# Altium PCB BlinkerAC.PcbDoc
Units mil, origin at the board's own origin, x right, y up, seen from the top; angles counter-clockwise.
Board outline 1150 x 2095 mil, 2 copper layers (Top Layer, Bottom Layer); 27 components, 16 nets, 122 pads, 101 vias.
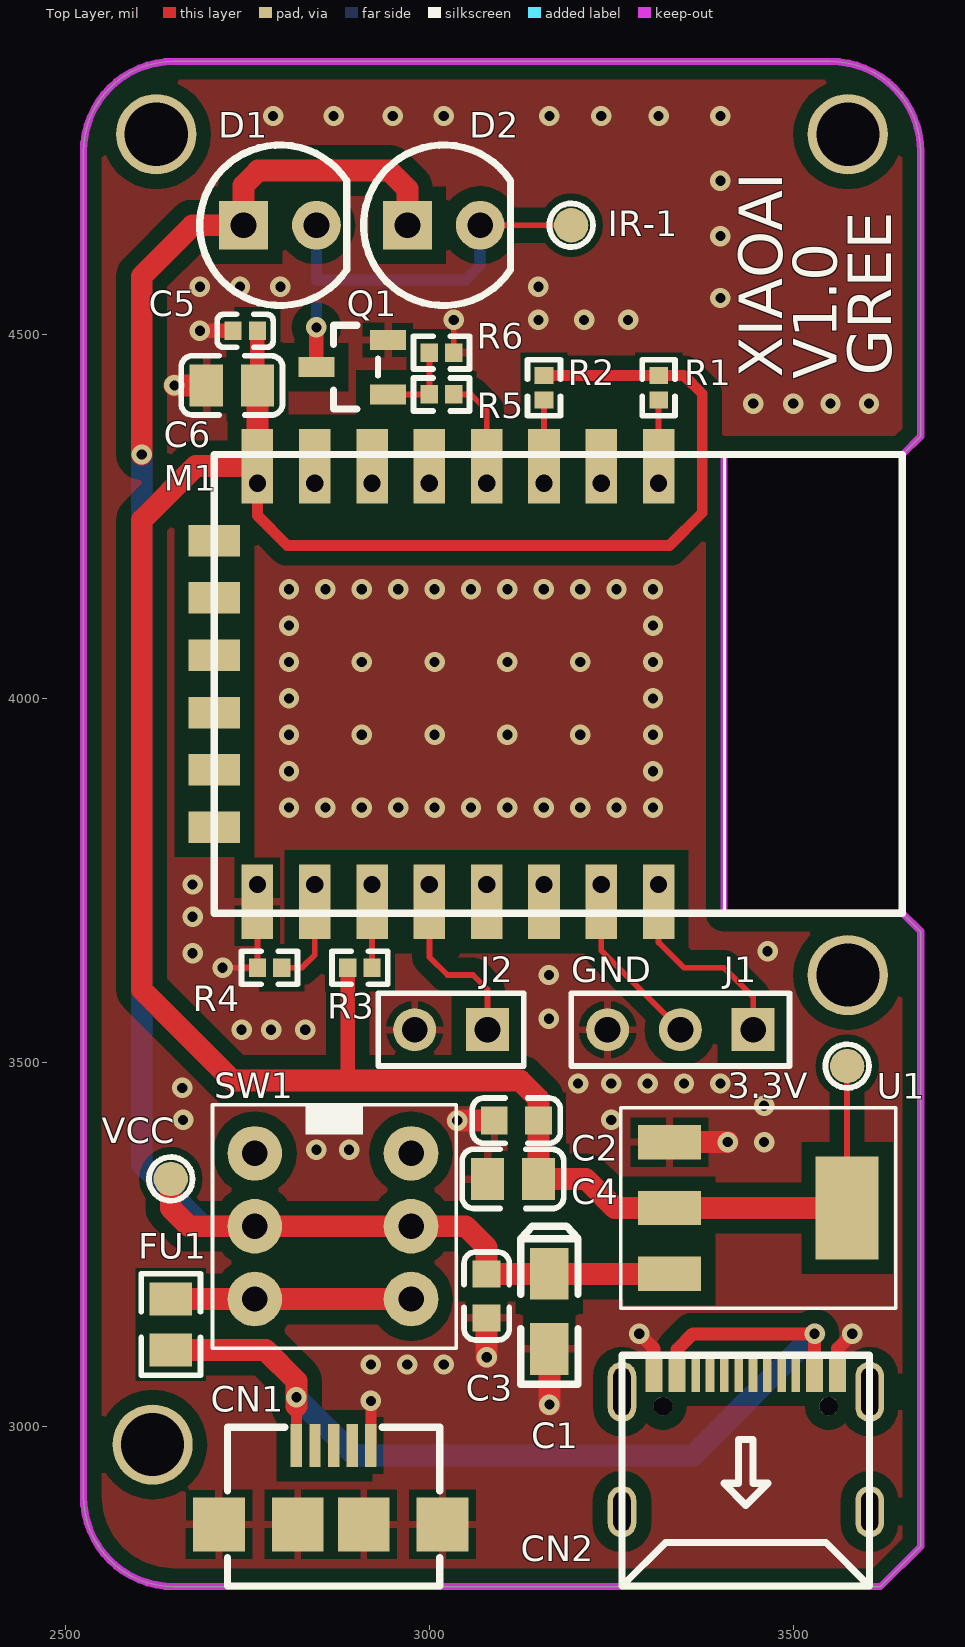
[diagram p0: Top Layer view]
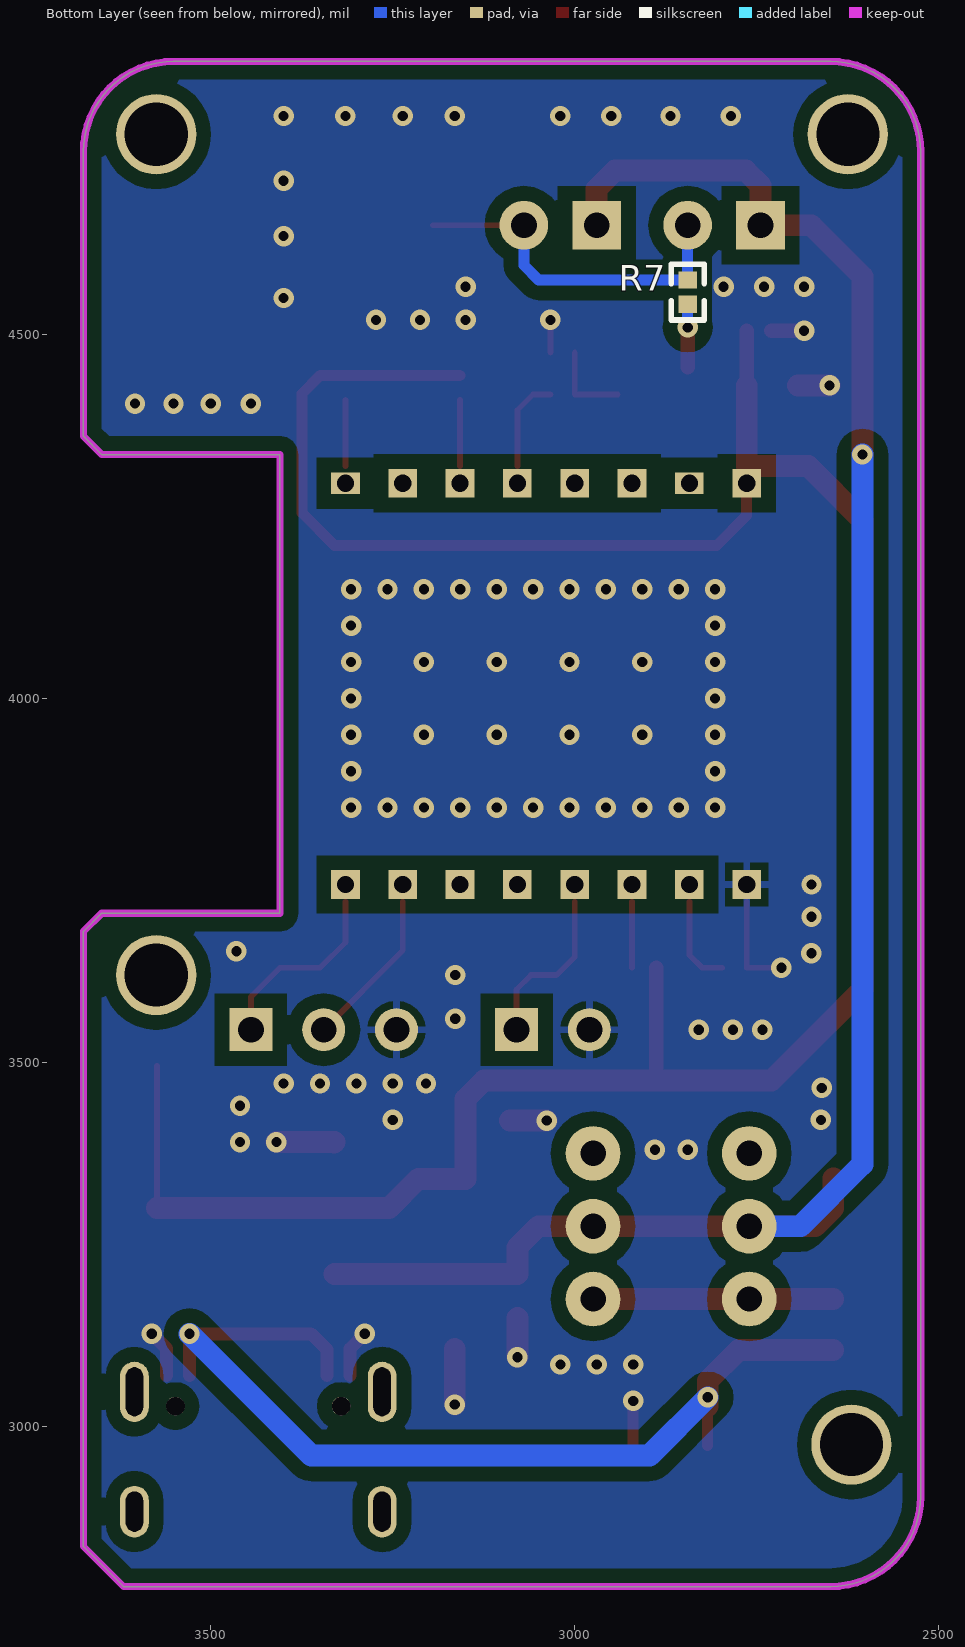
[diagram p1: Bottom Layer view, seen from below]
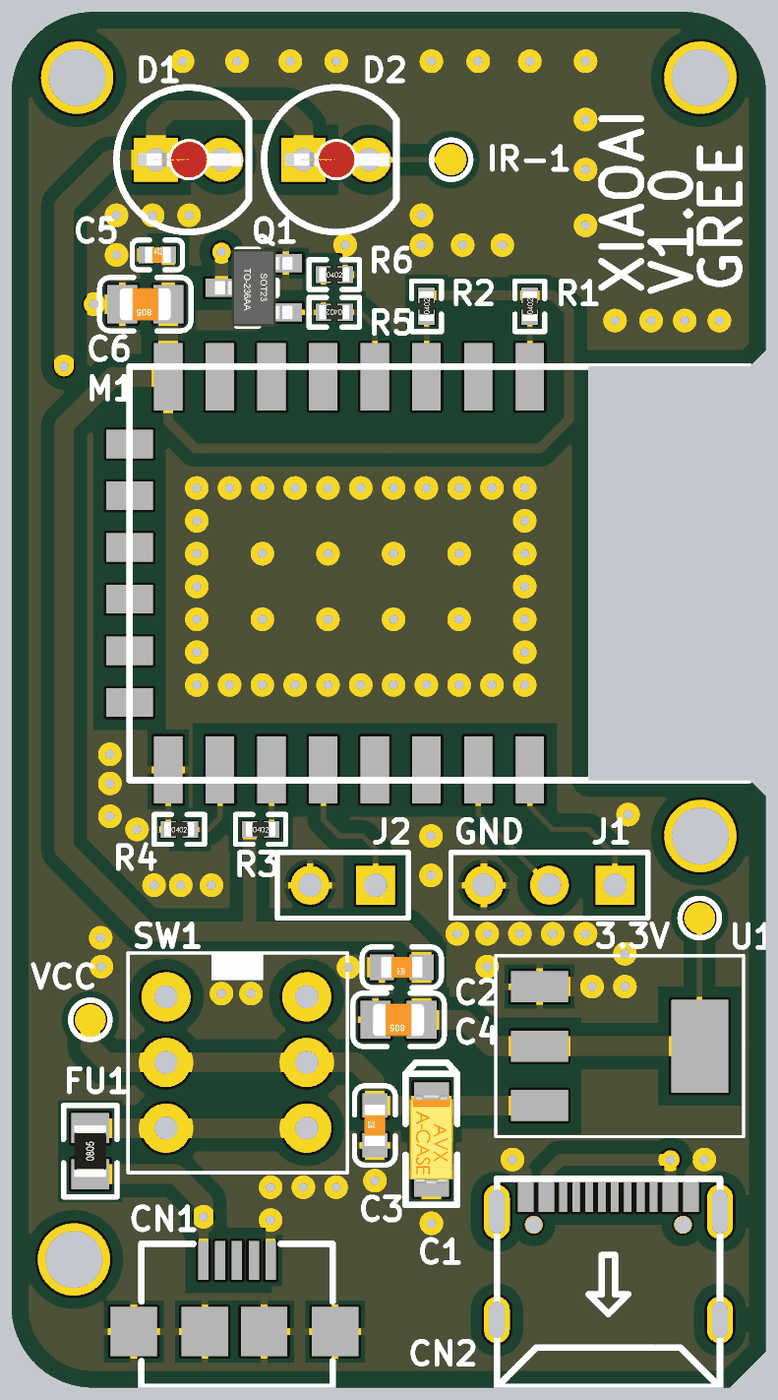
[diagram p2: 3D render of the assembled board from above, using the file's embedded part models]

## Layer stack, top to bottom
Top Solder: solder mask 0.4, Solder Resist, Dk 3.5
Top Layer: signal copper 1.4
Dielectric 1: dielectric 12.6, FR-4, Dk 4.8
Bottom Layer: signal copper 1.4
Bottom Solder: solder mask 0.4, Solder Resist, Dk 3.5

## Board outline
2525,2903.73 2525,4751.27 cw(c2648.73,4751.27) 2648.73,4875 3551.27,4875 cw(c3551.27,4751.27) 3675,4751.27 3675,4360 3650,4335 3405,4335 3405,3705 3650,3705 3675,3680 3675,2835 3620,2780 2648.73,2780 cw(c2648.73,2903.73)

## Design rules (kind name [scope] priority, off if disabled: settings)
Clearance [All] p1: gap=10 ignorepadtopadclearanceinfootprint=FALSE except(0: Arc-Hole Track-Hole SMDPad-Hole THPad-Hole Via-Hole Fill-Hole Poly-Hole Region-Hole Text-Hole; 5: SMDPad-SMDPad SMDPad-THPad; 20: Arc-Fill Arc-Poly Arc-Region Track-Fill Track-Poly Track-Region SMDPad-Fill SMDPad-Poly SMDPad-Region THPad-Fill THPad-Poly THPad-Region Via-Fill Via-Poly Via-Region Fill-Fill Fill-Poly Fill-Region Poly-Poly Poly-Region Region-Region)
HoleSize [All] p1: absolutevalues=TRUE maxlimit=1000 minlimit=1 maxpercent=80.000 minpercent=20.000
MinimumSolderMaskSliver [All] p1: minsoldermaskwidth=1
PolygonConnect [All] p1: thpad.connectstyle=Relief thpad.reliefconductorwidth=10 thpad.reliefentries=4 thpad.polygonreliefangle="90 Angle" thpad.airgapwidth=10 smdpad.connectstyle=Relief smdpad.reliefconductorwidth=10 smdpad.reliefentries=4 smdpad.polygonreliefangle="90 Angle" smdpad.airgapwidth=10 via.connectstyle=Direct via.reliefconductorwidth=10 via.reliefentries=4 via.polygonreliefangle="90 Angle" via.airgapwidth=10
RoutingVias [All] p1: holewidth=28 width=50 viastyle="Through Hole" minholewidth=28 minwidth=50 maxholewidth=28 maxwidth=50
SilkToSilkClearance [All] p1: silktosilkclearance=0
SilkToSolderMaskClearance [IsPad] p1: minsilkscreentomaskgap=0 clearancetoexposedcopper=TRUE
SolderMaskExpansion [All] p1: expansion=4
Width [All] p1: maxlimit=50 minlimit=5 preferedwidth=15
26 further rules are at their usual default settings.

## Components (designator, comment, footprint, x,y, rotation, side; value= is the part's Value field where it differs from the comment)
3.3V "TP" "TEST 1.2" 3574.09,3495 r90 top
C1 "106" CASE-A_3216 3165,3157.87 r90 top
C2 "104" 0603_C 3119.68,3420 r180 top
C3 "104" 0603_C 3078.9,3179.13 r90 top
C4 "106" 0805_C 3114.96,3340 r180 top
C5 "104" 0402_C 2747.2,4505 r0 top
C6 "106" 0805_C 2728.9,4430 r180 top
CN1 "MICROUSB-PLUG" Mini_USB 2854.72,2869.41 r0 top
CN2 "CN?" type-c 3434.84,3027.87 r0 top
D1 "LED" "LED 5MM-R" 2795,4650 r0 top
D2 "LED" "LED 5MM-R" 3020,4650 r0 top
FU1 "0R" 0805_R 2645,3139.96 r90 top
IR-1 "TP" "TEST 1.2" 3195,4650 r90 top
J1 "HEAD-P3(3X1)" "2.54mm PIN3 (3X1)" 3445,3545 r270 top
J2 "HEAD-P2(2X1)" "2.54mm PIN2 (2X1)" 3080,3545 r270 top
M1 "ESP-12E&F Module" "ESP-12E&F Module" 3010,4020 r270 top
Q1 "S8050" SOT-23(SOT-23-3) 2943.43,4417.6 r90 top
R1 "10K" 0402_R 3315.12,4426.73 r90 top
R2 "10K" 0402_R 3157.64,4426.73 r90 top
R3 "10K" 0402_R 2904.69,3630 r0 top
R4 "10K" 0402_R 2780.67,3630 r0 top
R5 "510R" 0402_R 3016.89,4417.6 r180 top
R6 "10K" 0402_R 3016.89,4475 r0 top
R7 "22R" 0402_R 2845,4558.19 r270 bottom
SW1 "SW" KEY_DPDT 2760.43,3375 r0 top
U1 "ASM1117-1.2" SOT223 3330,3390.55 r270 top
VCC "TP" "TEST 1.2" 2645,3340 r90 top

## Footprints (in the part's own frame and the unit in brackets; to place one, negate y for a bottom-side part, rotate by r counter-clockwise, add the part's x,y. Pads: shape width x height; smd on the part's side, far side on the other; paste and mask are expansions set on the pad)
"2.54mm PIN2 (2X1)" [mm]
  rect 1.5x1.5 hole 0.9: 1(0,0)
  round 1.5 hole 0.9: 2(0,-2.54)
  silkscreen extent -1.27,-3.81 1.27,1.27
"2.54mm PIN3 (3X1)" [mm]
  rect 1.5x1.5 hole 0.9: 1(0,0)
  round 1.5 hole 0.9: 2(0,-2.54) 3(0,-5.08)
  silkscreen extent -1.27,-6.35 1.27,1.27
0402_C [mm]
  rect 0.6x0.65 smd mask+0.051: 1(-0.425,0) 2(0.425,0)
  silkscreen extent -0.97,-0.58 0.97,0.58, body extent -0.48,-0.3 0.52,0.3, height 0.2
0402_R [mm]
  rect 0.6x0.65 smd mask+0.051: 1(-0.425,0) 2(0.425,0)
  silkscreen extent -0.97,-0.58 0.97,0.58, body extent -0.57,-0.27 0.58,0.28, height 0.41
0603_C [mm]
  rect 0.93x0.98 smd: 1(-0.77,0) 2(0.77,0)
  silkscreen extent -1.53,-0.79 1.54,0.79, body extent -0.8,-0.4 0.8,0.4, height 0.3
0805_C [mm]
  rect 1.16x1.47 smd: 1(-0.89,0) 2(0.89,0)
  silkscreen extent -1.77,-1.04 1.77,1.04, body extent -1,-0.62 1,0.63, height 0.77
0805_R [mm]
  rect 1.16x1.47 smd: 1(-0.89,0) 2(0.89,0)
  silkscreen extent -1.77,-1.04 1.77,1.03, body extent -1,-0.62 1,0.63, height 0.49
CASE-A_3216 [mm]
  rect 1.8x1.35 smd: 1(1.31,0) 2(-1.31,0)
  silkscreen extent -2.54,-1 2.97,1, body extent -1.7,-0.84 1.7,0.84, height 1.71
"ESP-12E&F Module" [mm]
  rect 2.6x1.1 smd: 1(-7.6,7.75) 2(-7.6,5.75) 3(-7.6,3.75) 4(-7.6,1.75) 5(-7.6,-0.25) 6(-7.6,-2.25) 7(-7.6,-4.25) 8(-7.6,-6.25) 15(7.6,-6.25) 16(7.6,-4.25) 17(7.6,-2.25) 18(7.6,-0.25) 19(7.6,1.75) 20(7.6,3.75) 21(7.6,5.75) 22(7.6,7.75)
  rect 0.762x1 hole 0.6: 1(-7,7.75) 7(-7,-4.25)
  rect 0.762x1 / inner rect 0.762x1 / far side rect 1x1 hole 0.6: 2(-7,5.75) 3(-7,3.75) 4(-7,1.75) 5(-7,-0.25) 6(-7,-2.25) 8(-7,-6.25) 15(7,-6.25) 16(7,-4.25) 17(7,-2.25) 18(7,-0.25) 19(7,1.75) 20(7,3.75) 21(7,5.75) 22(7,7.75)
  rect 1.1x1.8 smd: 9(-5,-7.75) 10(-3,-7.75) 11(-1,-7.75) 12(1,-7.75) 13(3,-7.75) 14(5,-7.75)
  silkscreen extent -8,-7.75 8,16.25
KEY_DPDT [mil]
  round 75 hole 35: 1(0,0) 2(0,-100) 3(0,-200) 4(214.57,0) 5(214.57,-100) 6(214.57,-200)
  silkscreen extent -58,-268 277,68
"LED 5MM-R" [mm] "红色5mm直插LED"
  rect 1.7x1.7 hole 0.9: A(-1.27,0)
  round 1.7 hole 0.9: K(1.27,0)
  silkscreen extent -2.8,-2.8 2.33,2.8, body extent -2.85,-2.85 2.45,2.85, height 8.75
Mini_USB [mm]
  rect 0.4x1.5 smd: 1(-0.946,2.645) 2(-0.296,2.645) 3(0.354,2.645) 4(1.004,2.645) 5(1.654,2.645)
  rect 1.8x1.9 smd: 6(4.154,-0.105) 7(1.404,-0.105) 8(-0.896,-0.105) 9(-3.646,-0.105)
  silkscreen extent -3.35,-2.25 4.05,3.29
SOT223 [mm]
  rect 1.2x2.2 smd: 1(0,0) 2(2.3,0) 3(4.6,0)
  rect 3.6x2.2 smd: 4(2.3,6.2)
  silkscreen extent -1.2,-1.7 5.8,7.9
SOT-23(SOT-23-3) [mm]
  rect 0.7x1.25 smd: 1(0,0) 2(1.9,0) 3(0.95,2.5)
  silkscreen extent -0.51,0.35 2.41,1.9, body extent -0.55,-0.25 2.45,2.75, height 1.3
"TEST 1.2" [mm] "测试点1.2mm"
  round 1.2 smd paste-1.2: 1(0,0)
  silkscreen extent -0.76,-0.76 0.76,0.76
type-c [mm]
  rect 0.6x1.14 smd: A1(-3.2,1.07) A4(-2.4,1.07) A9(2.4,1.07) A12(3.2,1.07)
  rect 0.3x1.14 smd: A5(-1.25,1.07) A6(-0.25,1.07) A7(0.25,1.07) A8(1.25,1.07) B5(1.75,1.07) B6(0.75,1.07) B7(-0.75,1.07) B8(-1.75,1.07)
  oval 1x1.8 hole 0.6 slot 1.4 at 90 deg: ""(-4.32,-3.68) ""(4.32,-3.68)
  oval 1x2.1 hole 0.6 slot 1.7 at 90 deg: ""(-4.32,0.5) ""(4.32,0.5)
  round 0.65 hole 0.65: ""(-2.89,0) ""(2.89,0)
  silkscreen extent -4.32,-6.28 4.32,1.78

## Part data
C1: library part Capacity_Murphy, "POLAR"
C2 C3 C4 C5 C6: library part Capacity_ceramic_Murphy, "ceramic", Package=0402, SuppliersPartNumber=C52923, ComponentLink1Description=供应商, ComponentLink1URL=http://www.szlcsc.com/product/details_53938.html, Supplier=LC
CN2: library part TYPEC16-PLUG, "TYPEC16-PLUG"
D1 D2: library part LED_Murphy, "LED（Red）", Package=0603, SuppliersPartNumber=C2286, ComponentLink1Description=供应商, ComponentLink1URL=http://www.szlcsc.com/product/details_2659.html, Supplier=LC
FU1 R1 R2 R3 R4 R5 R6 R7: library part Resistor_Murphy, "电阻", Package=0603, SuppliersPartNumber=C21190, ComponentLink1URL=http://www.szlcsc.com/product/details_21904.html, Supplier=LC
  FU1 R1 R2 R3 R4 R5 R6: ComponentLink1Description=供应商
  R7: ComponentLink1Description=供应商链接
Q1: "NPN Transistor"
SW1: library part "SW KEY-DPDT"
U1: "LDO"

## Free pads (board coordinates)
  round 110.24 hole 86.61: 2(2620,2975) 2(2625,4775) 2(3575,3620) 2(3575,4775)

## Via types
v1: diameter 28, hole 14, Top Layer to Bottom Layer, 101 vias

## Nets (pads, with @x,y where several pads share a name; then routed paths per layer and width w, separated by ;. In a path a pad name is that pad's centre, name@x,y a point inside that pad or via, vN(x,y) a via of type N, cw(c..) or ccw(c..) an arc to the next point about the centre after c; other vN are vias at no path point)
3.3V: 3.3V.1 C2.1 C4.1 C5.2 C6.1 M1.8 R1.2 R2.2 R3.1 U1.2 U1.4 | length 3634.3
  Top Layer w8: U1.4 3.3V.1
  Top Layer w15: M1.8@2763.94,4319.21 2763.94,4295.59 2763.94,4251.06 2805,4210 3330,4210 3375,4255 3375,4418.46 3350,4443.46 R1.2 R2.2
  Top Layer w20: C6.1 C5.2 ; 2887.95,3475 R3.1
  Top Layer w30: C6.1 2763.94,4319.21 2679.21,4319.21 2605,4245 2605,3600 2730,3475 2887.95,3475 3125,3475 3150,3450 C2.1 C4.1 3215,3340 3255,3300 U1.2 U1.4
GND: C1.2 C2.2 C3.1 C4.2 C5.1 C6.2 CN1.5 CN1.6 CN1.7 CN1.8 CN1.9 CN2.A1 CN2.A12 J1.3 J2.2 M1.15 Q1.2 R4.1 R6.2 U1.1 | length 727
  Top Layer w8: v1(2716.22,3630) R4.1 M1.15@2763.94,3720.79 ; R6.2 v1(3033.62,4520)
  Top Layer w15: CN1.5 v1(2919.84,3035)
  Top Layer w18: v1(3288.62,3127.17) 3308.86,3106.93 CN2.A1 ; CN2.A12 3560.83,3106.93 v1(3581.06,3127.17)
  Top Layer w20: v1(2685,4505) C5.1
  Top Layer w30: v1(2650,4430) C6.2 ; v1(3038.62,3420) C2.2 ; v1(3078.9,3095) C3.1 ; v1(3165,3030) C1.2 ; U1.1@3330.55,3390 U1.1 v1(3410,3390.55)
  other v1: 2919.84,3085 2969.84,3085 3019.84,3085 2845,3380 2890,3380 3460,3390.55 2661.94,3421 3250,3421 3460,3440.55 2660.75,3465 3204.45,3471 3250,3471 3300,3471 3350,3471 3400,3471 2742.28,3545 2782.83,3545 2829.72,3545 3164.37,3560 3164.37,3620 2675,3650 3464.84,3652.64 2674.96,3700 2674.96,3744.41 2807.32,3850 2857.32,3850 2907.32,3850 2957.32,3850 3007.32,3850 3057.32,3850 3107.32,3850 3157.32,3850 3207.32,3850 3257.32,3850 3307.32,3850 2807.32,3900 3307.32,3900 2807.32,3950 2907.32,3950 3007.32,3950 3107.32,3950 3207.32,3950 3307.32,3950 2807.32,4000 3307.32,4000 2807.32,4050 2907.32,4050 3007.32,4050 3107.32,4050 3207.32,4050 3307.32,4050 2807.32,4100 3307.32,4100 2807.32,4150 2857.32,4150 2907.32,4150 2957.32,4150 3007.32,4150 3057.32,4150 3107.32,4150 3157.32,4150 3207.32,4150 3257.32,4150 3307.32,4150 3445,4405 3500,4405 3551.27,4405 3604.09,4405 3150,4520 3212.71,4520 3273.19,4520 3400,4550 2685,4565.38 2740.04,4565.38 2795.59,4565.38 3150,4565.38 3400,4635 3400,4711.15 2785.59,4800 2868.62,4800 2950,4800 3020,4800 3165,4800 3236.38,4800 3315.12,4800 3400,4800
IR_LED: M1.4 R5.1 | length 131.1
  Top Layer w8: R5.1 3057.4,4417.6 3078.9,4396.1 M1.4@3078.9,4319.21
NetD1_K: D1.K D2.K IR-1.1 R7.1 | length 488.4
  Top Layer w8: D2.K IR-1.1
  Bottom Layer w15: D1.K R7.1 3049.92,4574.92 3070,4595 D2.K
NetFU1_2: FU1.2 SW1.3 SW1.6 | length 330
  Top Layer w30: FU1.2 SW1.3 SW1.6
NetJ1_1: J1.1 M1.22 | length 261.8
  Top Layer w8: M1.22@3315.12,3720.79 3315.12,3664.88 3350,3630 3405,3630 3445,3590 J1.1
NetJ1_2: J1.2 M1.21 | length 220.8
  Top Layer w8: M1.21@3236.38,3720.79 3236.38,3653.62 J1.2
NetJ2_1: J2.1 M1.18 | length 229.4
  Top Layer w8: M1.18@3000.16,3720.79 3000.16,3644.84 3025,3620 3060,3620 3080,3600 J2.1
NetM1_1: M1.1 R1.1 | length 90.8
  Top Layer w8: M1.1@3315.12,4319.21 R1.1
NetM1_3: M1.3 R2.1 | length 90.8
  Top Layer w8: M1.3@3157.64,4319.21 R2.1
NetM1_16: M1.16 R4.2 | length 125.7
  Top Layer w8: R4.2 2825,3630 2842.68,3647.68 M1.16@2842.68,3720.79
NetM1_17: M1.17 R3.2 | length 90.8
  Top Layer w8: R3.2 M1.17@2921.42,3720.79
NetQ1_1: Q1.1 R5.2 R6.1 | length 116.5
  Top Layer w8: Q1.1@2941.1,4417.6 R5.2 R6.1
NetQ1_3: Q1.3 R7.2 | length 86.5
  Top Layer w20: Q1.3 v1(2845,4509.65)
  Bottom Layer w15: v1(2845,4509.65) R7.2
TYPEC: CN1.1 CN2.A4 CN2.A9 FU1.1 | length 1383.8
  Top Layer w15: CN1.1 v1@2817.48,3027.87
  Top Layer w18: CN2.A4 3340.35,3105.35 3362.17,3127.17 v1(3529.33,3127.17) CN2.A9
  Top Layer w30: FU1.1 2775.08,3104.92 2817.48,3062.52 v1(2817.48,3040) v1@2817.48,3027.87
  Bottom Layer w30: v1(2817.48,3040) 2897.48,2960 3362.17,2960 v1(3529.33,3127.17)
VCC: C1.1 C3.2 D1.A D2.A SW1.2 SW1.5 U1.3 VCC.1 | length 2713
  Top Layer w30: v1(2605,4335) 2605,4580 2675,4650 D1.A 2745,4705 2765,4725 2945,4725 2970,4700 D2.A ; VCC.1@2644.45,3340.55 VCC.1 2645,3300 2670,3275 SW1.2 SW1.5 3050,3275 3078.9,3246.1 C3.2 C1.1 U1.3
  Bottom Layer w30: v1(2605,4335) 2605,3360 2690,3275 SW1.2
pads on no net: CN1.2 CN1.3 CN1.4 CN2. CN2.A5 CN2.A6 CN2.A7 CN2.A8 CN2.B5 CN2.B6 CN2.B7 CN2.B8 M1.2 M1.5 M1.6 M1.7 M1.9 M1.10 M1.11 M1.12 M1.13 M1.14 M1.19 M1.20 SW1.1 SW1.4

## Polygon pours and split planes (outlines as drawn)
GND on Bottom Layer "Top Layer-No Net1" (solid, remove dead copper, pour order 1): 2525,2903.73 2525,4751.27 cw(c2648.73,4751.27) 2648.73,4875 3551.27,4875 cw(c3551.27,4751.27) 3675,4751.27 3675,4360 3650,4335 3405,4335 3405,3705 3650,3705 3675,3680 3675,2835 3620,2780 2648.73,2780 cw(c2648.73,2903.73)
GND on Top Layer "Top Layer-No Net" (solid, remove dead copper, pour order 0): 2525,2903.73 2525,4751.27 cw(c2648.73,4751.27) 2648.73,4875 3551.27,4875 cw(c3551.27,4751.27) 3675,4751.27 3675,4360 3650,4335 3405,4335 3405,3705 3650,3705 3675,3680 3675,2835 3620,2780 2648.73,2780 cw(c2648.73,2903.73)

## Keep-outs
Keep-Out Layer:
  the board outline again, w10

## Silkscreen, mask and mechanical layers (free items; w line width, h text height)
Top Overlay:
  text "GREE" at 3635,4443.19 h60 r90
  text "XIAOAI" at 3485,4440.24 h60 r90
  text "V1.0" at 3560,4438.54 h60 r90
  text "GND" at 3194.96,3610 h35